# Altium PCB pcb.PcbDoc (part 1 of 2)
Units mm, origin at the board's own origin, x right, y up, seen from the top; angles counter-clockwise.
Board outline 152.4 x 101.6 mm, 4 copper layers (Top Layer, Internal Plane 1, Internal Plane 2, Bottom Layer); 121 components, 160 nets, 1544 pads, 60 vias.
Unrouted connection lines stored in the file: 211.
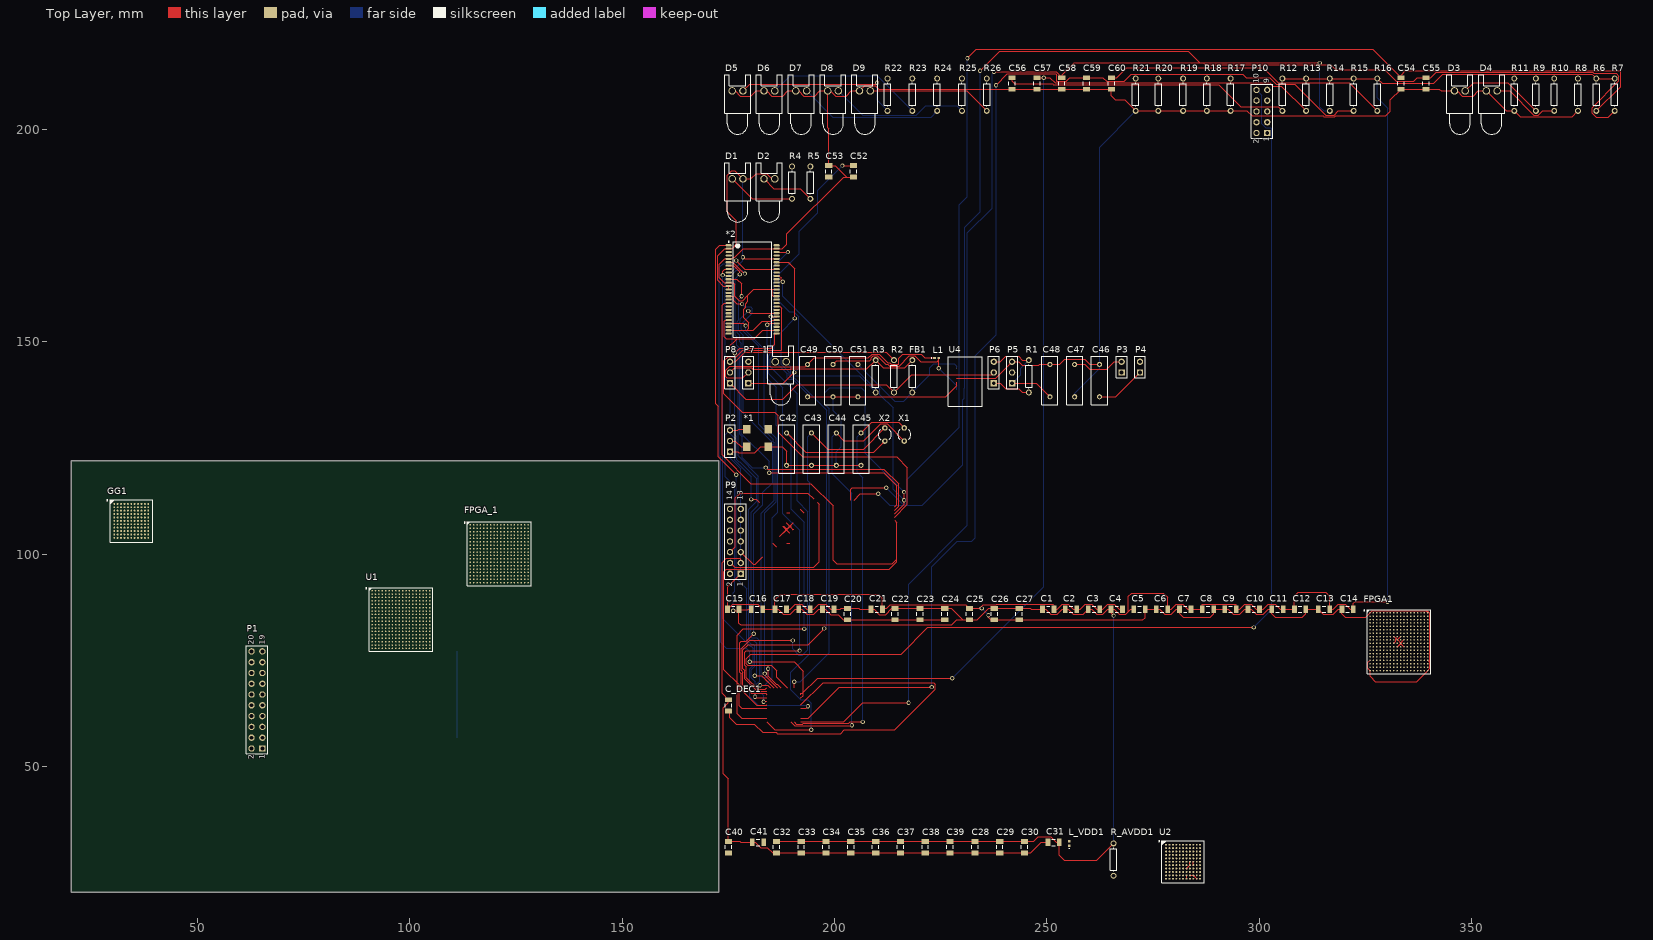
[diagram p0: Top Layer view]
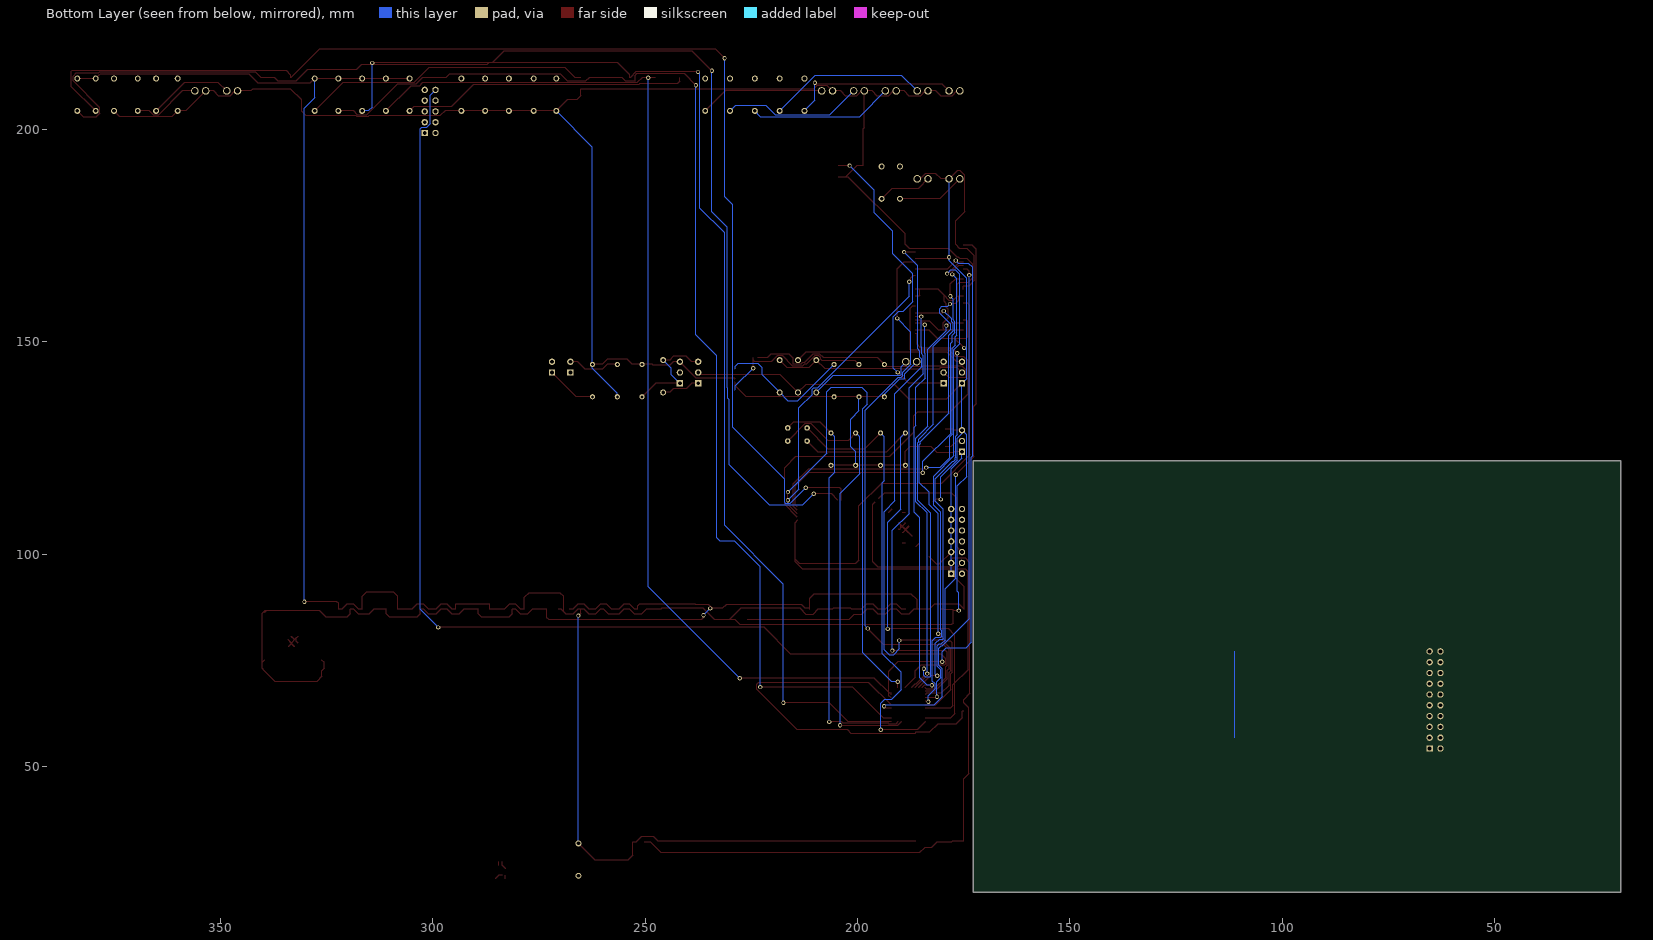
[diagram p1: Bottom Layer view, seen from below]
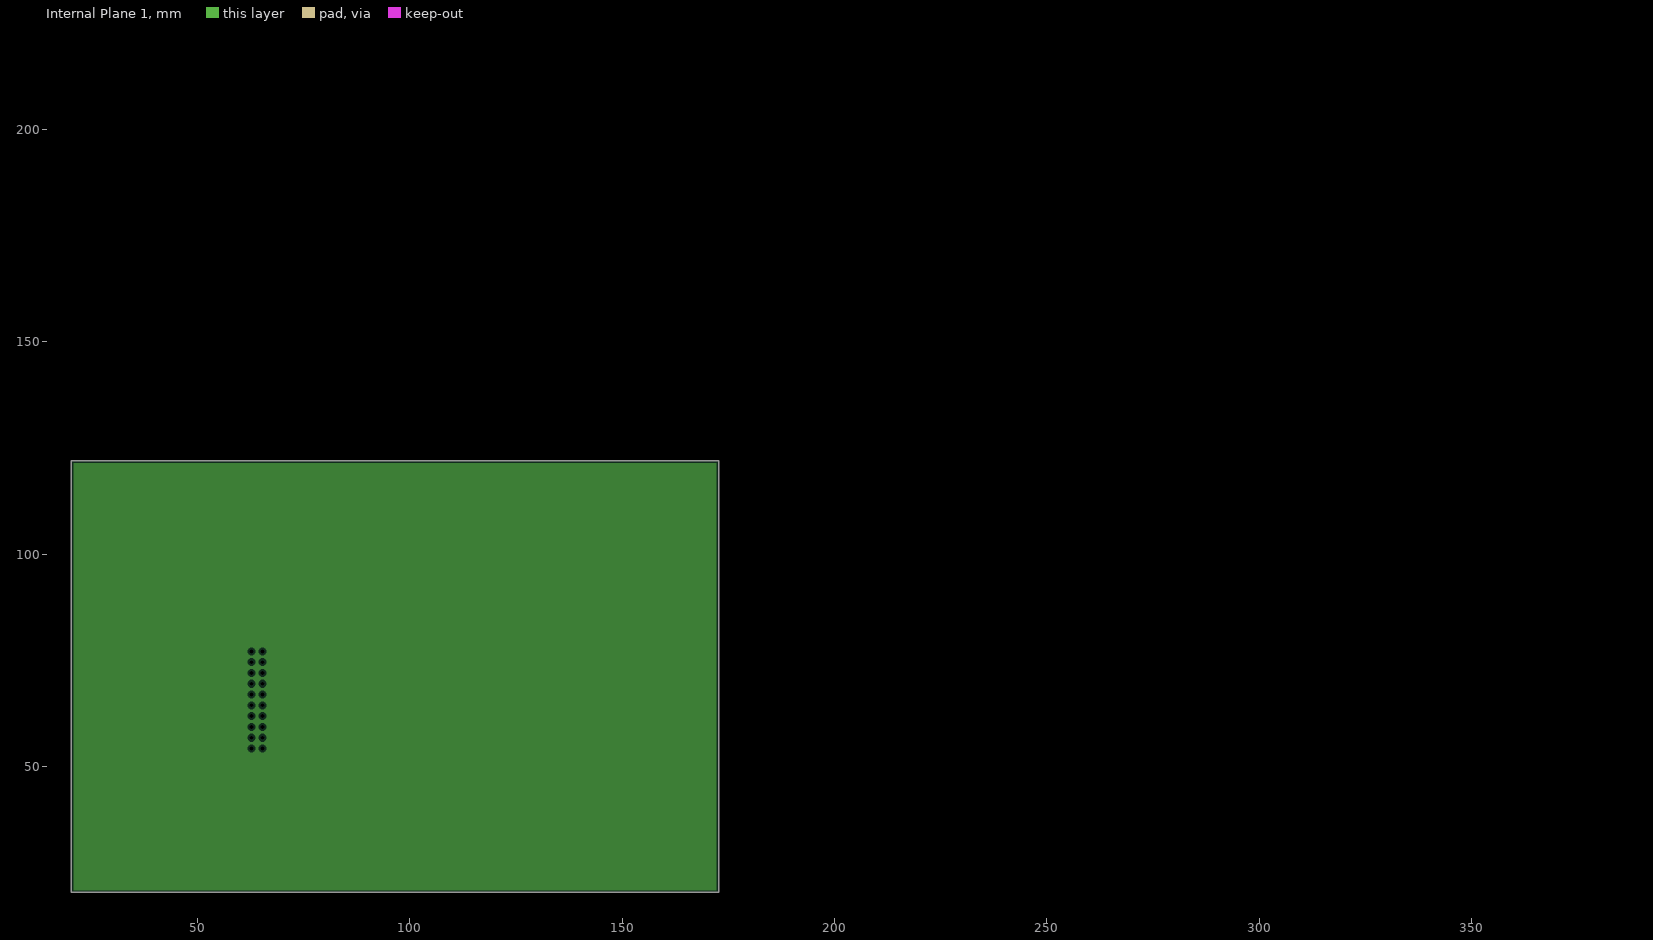
[diagram p2: Internal Plane 1, clearances drawn from the general rule]
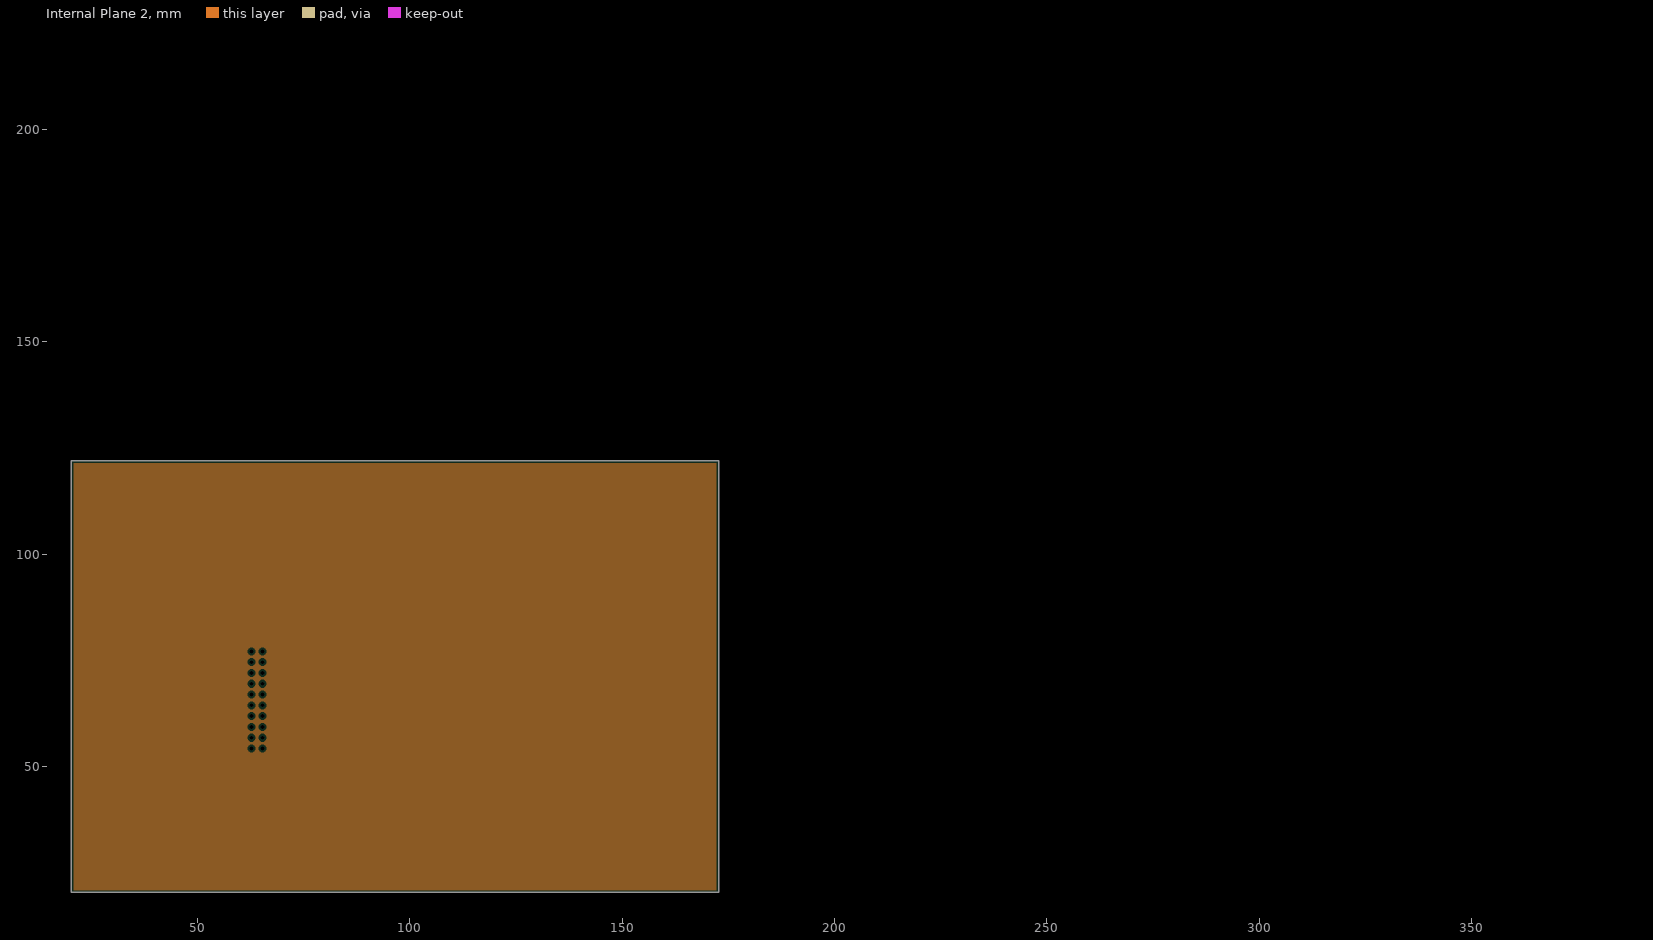
[diagram p3: Internal Plane 2, clearances drawn from the general rule]

## Layer stack, top to bottom
Top Layer: signal copper 0.0356
Dielectric: dielectric 0.32, FR-4, Dk 4.8
Internal Plane 1: plane copper 0.0356
Dielectric: dielectric 0.32, FR-4, Dk 4.8
Internal Plane 2: plane copper 0.0356
Dielectric: dielectric 0.32, FR-4, Dk 4.8
Bottom Layer: signal copper 0.0356

## Board outline
20.32,20.32 172.72,20.32 172.72,121.92 20.32,121.92

## Design rules (kind name [scope] priority, off if disabled: settings)
AssemblyTestPointUsage AssemblyTestPointUsage_1 [All] p2:
AssemblyTestpoint AssemblyTestpoint_1 [All] p2: testpointundercomponent=TRUE minsize=1.016 maxsize=2.54 preferedsize=1.524 minholesize=0 maxholesize=1.016 preferedholesize=0.813 testpointgrid=0.025 usegrid=TRUE gridtolerance=0 allowsidetop=TRUE allowsidebottom=TRUE
Clearance [All] p1: gap=0.2
ComponentClearance ComponentClearance_1 [All] p2: gap=0.254 collisioncheckmode=3 verticalgap=0.254 showdistances=FALSE
DiffPairsRouting DiffPairsRouting_1 [All] p2: maxlimit=0.254 minlimit=0.254 mostfreqgap=0.254 maxuncoupledlength=12.7
FabricationTestPointUsage TestPointUsage [All] p2: valid=0 allowmultiple=FALSE
FabricationTestpoint Testpoint [All] p2: side=3 testpointundercomponent=TRUE minsize=1.016 maxsize=2.54 preferedsize=1.524 minholesize=0 maxholesize=1.016 preferedholesize=0.813 testpointgrid=0.025 allowsidetop=TRUE allowsidebottom=TRUE usegrid=TRUE gridtolerance=0
FanoutControl Fanout_LCC [IsLCC] p1: bgadir=Out bgaviamode=Centered fanoutstyle=Auto fanoutdirection=Alternating viagrid=0.025 // Fanout_LCC (Default Rule)
FanoutControl Fanout_BGA [IsBGA] p2: bgadir=Out bgaviamode=Centered fanoutstyle=Auto fanoutdirection=Alternating viagrid=0.025 // Fanout_BGA (Default Rule)
FanoutControl Fanout_Small [(CompPinCount < 5)] p3: bgadir=Out bgaviamode=Centered fanoutstyle=Auto fanoutdirection=OutThenIn viagrid=0.025 // Fanout_Small (Default Rule)
FanoutControl Fanout_SOIC [IsSOIC] p4: bgadir=Out bgaviamode=Centered fanoutstyle=Auto fanoutdirection=Alternating viagrid=0.025 // Fanout_SOIC (Default Rule)
FanoutControl Fanout_BGA_1 [IsBGA] p6: bgadir=Out bgaviamode=Centered fanoutstyle=Auto fanoutdirection=Alternating viagrid=0.025 // Fanout_BGA (Default Rule)
FanoutControl Fanout_LCC_1 [IsLCC] p7: bgadir=Out bgaviamode=Centered fanoutstyle=Auto fanoutdirection=Alternating viagrid=0.025 // Fanout_LCC (Default Rule)
FanoutControl Fanout_SOIC_1 [IsSOIC] p8: bgadir=Out bgaviamode=Centered fanoutstyle=Auto fanoutdirection=Alternating viagrid=0.025 // Fanout_SOIC (Default Rule)
FanoutControl Fanout_Small_1 [(CompPinCount < 5)] p9: bgadir=Out bgaviamode=Centered fanoutstyle=Auto fanoutdirection=OutThenIn viagrid=0.025 // Fanout_Small (Default Rule)
FanoutControl Fanout_Default_1 [All] p10: bgadir=Out bgaviamode=Centered fanoutstyle=Auto fanoutdirection=Alternating viagrid=0.025 // Fanout_Default (Default Rule)
Height Height_1 [All] p2: minheight=0 maxheight=25.4 prefheight=12.7
HoleSize HoleSize_1 [All] p2: absolutevalues=TRUE maxlimit=2.54 minlimit=0.025 maxpercent=80.000 minpercent=20.000
HoleToHoleClearance HoleToHoleClearance_1 [All] p2: gap=0.254 allowstackedmicrovias=TRUE
LayerPairs LayerPairs_1 [All] p2: enforce=TRUE
MinimumSolderMaskSliver MinimumSolderMaskSliver_1 [All] p2: minsoldermaskwidth=0.254
NetAntennae NetAntennae_1 [All] p2: netantennaetolerance=0
PasteMaskExpansion PasteMaskExpansion_1 [All] p2: expansion=0
PlaneClearance [All] p1: clearance=0.508
PlaneClearance PlaneClearance_1 [All] p2: clearance=0.508
PlaneConnect [All] p1: planeconnectstyle=Relief reliefexpansion=0.508 reliefentries=4 reliefconductorwidth=0.254 reliefairgap=0.254
PolygonConnect [All] p1: connectstyle=Relief reliefconductorwidth=0.254 reliefentries=4 polygonreliefangle="90 Angle" airgapwidth=0.254
PolygonConnect PolygonConnect_1 [All] p2: connectstyle=Relief reliefconductorwidth=0.254 reliefentries=4 polygonreliefangle="90 Angle" airgapwidth=0.254
RoomDefinition U_user_interface [InComponentClass('U_user_interface')] p1: confinementstyle=ConfineIn formatcopy=TRUE lockcomponents=FALSE outline 173.863,196.215 385.953,196.215 385.953,215.646 173.863,215.646
RoomDefinition U_uart_usb_bridge [InComponentClass('U_uart_usb_bridge')] p2: confinementstyle=ConfineIn formatcopy=TRUE lockcomponents=FALSE outline 173.863,177.927 208.28,177.927 208.28,194.945 173.863,194.945
RoomDefinition U_sram [InComponentClass('U_sram')] p3: confinementstyle=ConfineIn formatcopy=TRUE lockcomponents=FALSE outline 173.863,150.495 187.579,150.495 187.579,176.657 173.863,176.657
RoomDefinition U_power_supply [InComponentClass('U_power_supply')] p4: confinementstyle=ConfineIn formatcopy=TRUE lockcomponents=FALSE outline 173.863,134.493 273.812,134.493 273.812,149.352 173.863,149.352
RoomDefinition U_oscillation [InComponentClass('U_oscillation')] p5: confinementstyle=ConfineIn formatcopy=TRUE lockcomponents=FALSE outline 173.863,118.745 218.186,118.745 218.186,133.223 173.863,133.223
RoomDefinition U_fpga_sheet [InComponentClass('U_fpga_sheet')] p6: confinementstyle=ConfineIn formatcopy=TRUE lockcomponents=FALSE outline 173.863,91.948 216.154,91.948 216.154,117.475 173.863,117.475
RoomDefinition U_fpga_power [InComponentClass('U_fpga_power')] p7: confinementstyle=ConfineIn formatcopy=TRUE lockcomponents=FALSE outline 173.863,70.612 341.63,70.612 341.63,90.678 173.863,90.678
RoomDefinition U_arm_sheet [InComponentClass('U_arm_sheet')] p8: confinementstyle=ConfineIn formatcopy=TRUE lockcomponents=FALSE outline 173.863,37.084 202.184,37.084 202.184,69.469 173.863,69.469
RoomDefinition U_arm_power [InComponentClass('U_arm_power')] p9: confinementstyle=ConfineIn formatcopy=TRUE lockcomponents=FALSE outline 173.863,21.844 287.782,21.844 287.782,35.814 173.863,35.814
RoutingPriority RoutingPriority_1 [All] p2: routingpriority=0
RoutingTopology RoutingTopology_1 [All] p2: topology=Shortest
RoutingVias [All] p1: holewidth=0.6 width=1 viastyle="Through Hole" minholewidth=0.711 minwidth=1.27 maxholewidth=0.711 maxwidth=1.27
ShortCircuit ShortCircuit_1 [All] p2: allowed=FALSE
SilkToSilkClearance SilkToSilkClearance_1 [All] p2: silktosilkclearance=0.254
SilkToSolderMaskClearance SilkscreenOverComponentPads [IsPad] p2: minsilkscreentomaskgap=0.254 clearancetoexposedcopper=TRUE
SolderMaskExpansion [All] p1: expansion=0.102
SolderMaskExpansion SolderMaskExpansion_1 [All] p2: expansion=0.102
UnRoutedNet UnRoutedNet_1 [All] p2:
Width [All] p1: maxlimit=0.2 minlimit=0.2 preferedwidth=0.2
22 further rules are at their usual default settings.

## Classes and differential pairs
net class GPIO_FPGA[15..0]: GPIO_FPGA0 GPIO_FPGA1 GPIO_FPGA2 GPIO_FPGA3 GPIO_FPGA4 GPIO_FPGA5 GPIO_FPGA6 GPIO_FPGA7 GPIO_FPGA8 GPIO_FPGA9 GPIO_FPGA10 GPIO_FPGA11 GPIO_FPGA12 GPIO_FPGA13 GPIO_FPGA14 GPIO_FPGA15
net class GPIO[21..0]: GPIO0 GPIO1 GPIO2 GPIO3 GPIO4 GPIO5 GPIO6 GPIO7 GPIO8 GPIO9 GPIO10 GPIO11 GPIO12 GPIO13 GPIO14 GPIO15 GPIO16 GPIO17 GPIO18 GPIO19 GPIO20 GPIO21
net class EBI_AD[15..0]: EBI_AD0 EBI_AD1 EBI_AD2 EBI_AD3 EBI_AD4 EBI_AD5 EBI_AD6 EBI_AD7 EBI_AD8 EBI_AD9 EBI_AD10 EBI_AD11 EBI_AD12 EBI_AD13 EBI_AD14 EBI_AD15
net class EBI_A[22..0]: EBI_A0 EBI_A1 EBI_A2 EBI_A3 EBI_A4 EBI_A5 EBI_A6 EBI_A7 EBI_A8 EBI_A9 EBI_A10 EBI_A11 EBI_A12 EBI_A13 EBI_A14 EBI_A15 EBI_A16 EBI_A17 EBI_A18 EBI_A19 EBI_A20 EBI_A21 EBI_A22
net class DAC0_OUT[1..0]: DAC0_OUT0 DAC0_OUT1
net class CTRL_BUS[24..0]: CTRL_BUS0 CTRL_BUS1 CTRL_BUS2
component class U_user_interface: C54 C55 C56 C57 C58 C59 C60 D3 D4 D5 D6 D7 D8 D9 P10 R6 R7 R8 R9 R10 R11 R12 R13 R14 R15 R16 R17 R18 R19 R20 R21 R22 R23 R24 R25 R26
component class U_uart_usb_bridge: C52 C53 D1 D2 R4 R5 U5
component class U_sram: *2
component class U_power_supply: 1 ACS1 ACS2 C46 C47 C48 C49 C50 C51 FB1 L1 P3 P4 P5 P6 P7 P8 R1 R2 R3 U3 U4
component class U_oscillation: *1 C42 C43 C44 C45 P2 X1 X2
component class U_fpga_sheet: FPGA_1 P9 U1
component class U_fpga_power: C1 C2 C3 C4 C5 C6 C7 C8 C9 C10 C11 C12 C13 C14 C15 C16 C17 C18 C19 C20 C21 C22 C23 C24 C25 C26 C27 FPGA1
component class U_arm_sheet: C_DEC1 GG1 P1
component class U_arm_power: C28 C29 C30 C31 C32 C33 C34 C35 C36 C37 C38 C39 C40 C41 L_VDD1 R_AVDD1 U2

## Components (designator, comment, footprint, x,y, rotation, side; value= is the part's Value field where it differs from the comment)
1 "LED0" LED-0 187.325,145.288 r0 top
*1 "TXC-7W" TXC-7W 179.324,125.222 r0 top
*2 "CY7C1061AV33" CY7C1061AV33 180.721,162.306 r0 top
C1 "Cap Semi" C1206 250.317,86.995 r0 top
C2 "Cap Semi" C1206 255.651,86.995 r0 top
C3 "Cap Semi" C1206 261.112,86.995 r0 top
C4 "Cap Semi" C1206 266.446,86.995 r0 top
C5 "Cap Semi" C1206 271.78,86.995 r0 top
C6 "Cap Semi" C1206 277.114,86.995 r0 top
C7 "Cap Semi" C1206 282.575,86.995 r0 top
C8 "Cap Semi" C1206 287.909,86.995 r0 top
C9 "Cap Semi" C1206 293.243,86.995 r0 top
C10 "Cap Semi" C1206 298.704,86.995 r0 top
C11 "Cap Semi" C1206 304.292,86.995 r0 top
C12 "Cap Semi" C1206 309.626,86.995 r0 top
C13 "Cap Semi" C1206 315.214,86.995 r0 top
C14 "Cap Semi" C1206 320.802,86.995 r0 top
C15 "Cap Semi" C1206 176.149,86.995 r0 top
C16 "Cap Semi" C1206 181.737,86.995 r0 top
C17 "Cap Semi" C1206 187.325,86.995 r0 top
C18 "Cap Semi" C1206 192.913,86.995 r0 top
C19 "Cap Semi" C1206 198.501,86.995 r0 top
C20 "Cap Semi" C1206 203.073,85.852 r90 top
C21 "Cap Semi" C1206 209.931,86.995 r0 top
C22 "Cap Semi" C1206 214.249,85.852 r90 top
C23 "Cap Semi" C1206 220.091,85.852 r90 top
C24 "Cap Semi" C1206 225.933,85.852 r90 top
C25 "Cap Semi" C1206 231.775,85.852 r90 top
C26 "Cap Semi" C1206 237.617,85.852 r90 top
C27 "Cap Semi" C1206 243.459,85.852 r90 top
C28 "Cap Semi" C1206 233.045,30.988 r90 top
C29 "Cap Semi" C1206 238.887,30.988 r90 top
C30 "Cap Semi" C1206 244.729,30.988 r90 top
C31 "Cap Semi" C1206 251.587,32.131 r0 top
C32 "Cap Semi" C1206 186.309,30.988 r90 top
C33 "Cap Semi" C1206 192.151,30.988 r90 top
C34 "Cap Semi" C1206 197.993,30.988 r90 top
C35 "Cap Semi" C1206 203.835,30.988 r90 top
C36 "Cap Semi" C1206 209.677,30.988 r90 top
C37 "Cap Semi" C1206 215.519,30.988 r90 top
C38 "Cap Semi" C1206 221.361,30.988 r90 top
C39 "Cap Semi" C1206 227.203,30.988 r90 top
C40 "Cap Semi" C1206 175.006,30.988 r90 top
C41 "Cap Semi" C1206 181.991,32.131 r0 top
C42 "Cap" RAD-0.3 188.722,124.714 r90 top
C43 "Cap" RAD-0.3 194.564,124.714 r90 top
C44 "Cap" RAD-0.3 200.406,124.714 r90 top
C45 "Cap" RAD-0.3 206.248,124.714 r90 top
C46 "Cap" RAD-0.3 262.382,140.843 r90 top
C47 "Cap" RAD-0.3 256.54,140.843 r90 top
C48 "Cap" RAD-0.3 250.698,140.843 r90 top
C49 "Cap" RAD-0.3 193.675,140.843 r90 top
C50 "Cap" RAD-0.3 199.644,140.843 r90 top
C51 "Cap" RAD-0.3 205.486,140.843 r90 top
C52 "Cap Semi" C1206 204.47,190.119 r90 top
C53 "Cap Semi" C1206 198.628,190.119 r90 top
C54 "Cap Semi" C1206 333.375,210.82 r90 top
C55 "Cap Semi" C1206 339.217,210.82 r90 top
C56 "Cap Semi" C1206 241.808,210.82 r90 top
C57 "Cap Semi" C1206 247.65,210.82 r90 top
C58 "Cap Semi" C1206 253.492,210.82 r90 top
C59 "Cap Semi" C1206 259.334,210.82 r90 top
C60 "Cap Semi" C1206 265.176,210.82 r90 top
C_DEC1 "Cap Semi" C1206 175.006,64.389 r90 top
D1 "LED0" LED-0 177.165,188.341 r0 top
D2 "LED0" LED-0 184.658,188.341 r0 top
D3 "LED0" LED-0 347.218,209.042 r0 top
D4 "LED0" LED-0 354.711,209.042 r0 top
D5 "LED0" LED-0 177.165,209.042 r0 top
D6 "LED0" LED-0 184.658,209.042 r0 top
D7 "LED0" LED-0 192.151,209.042 r0 top
D8 "LED0" LED-0 199.644,209.042 r0 top
D9 "LED0" LED-0 207.137,209.042 r0 top
FB1 "Res1" AXIAL-0.3 218.313,141.859 r90 top
FPGA1 "XC6SLX16-2CSG324C" CSG324 332.867,79.375 r0 top
FPGA_1 "XC6SLX16-2CSG324C" CSG324 121.031,100.076 r0 top
GG1 "EFM32GG990F1024-BGA112" ENMR-BGA112 34.417,107.823 r0 top
L1 "Inductor" 0402-A 224.028,146.177 r0 top
L_VDD1 "BLM21B102S or similar" 0402-A 255.27,31.877 r90 top
P1 "Header 10X2" HDR2X10 65.278,54.229 r90 top
P2 "Header 3" HDR1X3 175.387,124.079 r90 top
P3 "Header 2" HDR1X2 267.589,142.748 r90 top
P4 "Header 2" HDR1X2 271.907,142.748 r90 top
P5 "Header 3" HDR1X3 241.808,140.208 r90 top
P6 "Header 3" HDR1X3 237.49,140.208 r90 top
P7 "Header 3" HDR1X3 179.705,140.208 r90 top
P8 "Header 3" HDR1X3 175.387,140.208 r90 top
P9 "Header 7X2" HDR2X7 177.927,95.377 r90 top
P10 "Header 5X2" HDR2X5 301.879,199.136 r90 top
R1 "Rsense" AXIAL-0.3 245.745,141.859 r90 top
R2 "Rsense" AXIAL-0.3 213.995,141.859 r90 top
R3 "Res1" AXIAL-0.3 209.677,141.859 r90 top
R4 "Res1" AXIAL-0.3 189.992,187.452 r90 top
R5 "Res1" AXIAL-0.3 194.31,187.452 r90 top
R6 "Res1" AXIAL-0.3 379.349,208.153 r90 top
R7 "Res1" AXIAL-0.3 383.667,208.153 r90 top
R8 "Res1" AXIAL-0.3 375.031,208.153 r90 top
R9 "Res1" AXIAL-0.3 365.125,208.153 r90 top
R10 "Res1" AXIAL-0.3 369.443,208.153 r90 top
R11 "Res1" AXIAL-0.3 360.045,208.153 r90 top
R12 "Res1" AXIAL-0.3 305.435,208.153 r90 top
R13 "Res1" AXIAL-0.3 311.023,208.153 r90 top
R14 "Res1" AXIAL-0.3 316.611,208.153 r90 top
R15 "Res1" AXIAL-0.3 322.199,208.153 r90 top
R16 "Res1" AXIAL-0.3 327.787,208.153 r90 top
R17 "Res1" AXIAL-0.3 293.243,208.153 r90 top
R18 "Res1" AXIAL-0.3 287.655,208.153 r90 top
R19 "Res1" AXIAL-0.3 282.067,208.153 r90 top
R20 "Res1" AXIAL-0.3 276.225,208.153 r90 top
R21 "Res1" AXIAL-0.3 270.891,208.153 r90 top
R22 "Res1" AXIAL-0.3 212.471,208.153 r90 top
R23 "Res1" AXIAL-0.3 218.313,208.153 r90 top
R24 "Res1" AXIAL-0.3 224.155,208.153 r90 top
R25 "Res1" AXIAL-0.3 229.997,208.153 r90 top
R26 "Res1" AXIAL-0.3 235.839,208.153 r90 top
R_AVDD1 "Res1" AXIAL-0.3 265.684,28.067 r90 top
U1 "XC6SLX16-2CSG324C" CSG324 97.917,84.582 r0 top
U2 "EFM32GG990F1024-BGA112" ENMR-BGA112 282.067,27.559 r0 top
U4 "SR10S3V3" SR10S3V3_Footprint 228.727,138.303 r90 top
X1 "32MHz" R38 216.408,128.143 r0 top
X2 "32.768kHz" R38 211.836,128.143 r0 top

## Footprints (in the part's own frame and the unit in brackets; to place one, negate y for a bottom-side part, rotate by r counter-clockwise, add the part's x,y. Pads: shape width x height; smd on the part's side, far side on the other; paste and mask are expansions set on the pad)
0402-A [mm] "Chip Inductor, Body 1.0x0.5mm, IPC High Density"
  rect 0.6x0.5 smd: 1(-0.5,0) 2(0.5,0)
  silkscreen extent -1.1,-0.15 -1.1,0.15, body extent -0.55,-0.3 0.55,0.3, height 0.55
AXIAL-0.3 [mm] "Axial Device, Thru-Hole; 2 Leads; 0.3 in Pin Spacing"
  round 1.4 hole 0.85: 1(-3.81,0) 2(3.81,0)
  silkscreen extent -2.77,-0.76 2.77,0.76
C1206 [mm] "Chip Capacitor, Body 3.2x1.6mm, IPC High Density"
  rect 1.1x1.7 smd: 1(-1.35,0) 2(1.35,0)
  silkscreen extent -0.4,-0.75 0.4,0.75, body extent -1.7,-0.9 1.7,0.9, height 1.3
CSG324 [mm] "BGA, 324-Leads, Body 15x15mm, Pitch 0.8mm"
  round 0.36 smd: A1(-6.8,6.8) A2(-6,6.8) A3(-5.2,6.8) A4(-4.4,6.8) A5(-3.6,6.8) A6(-2.8,6.8) A7(-2,6.8) A8(-1.2,6.8) A9(-0.4,6.8) A10(0.4,6.8) A11(1.2,6.8) A12(2,6.8) A13(2.8,6.8) A14(3.6,6.8) A15(4.4,6.8) A16(5.2,6.8) A17(6,6.8) A18(6.8,6.8) B1(-6.8,6) B2(-6,6) B3(-5.2,6) B4(-4.4,6) B5(-3.6,6) B6(-2.8,6) B7(-2,6) B8(-1.2,6) B9(-0.4,6) B10(0.4,6) B11(1.2,6) B12(2,6) B13(2.8,6) B14(3.6,6) B15(4.4,6) B16(5.2,6) B17(6,6) B18(6.8,6) C1(-6.8,5.2) C2(-6,5.2) C3(-5.2,5.2) C4(-4.4,5.2) C5(-3.6,5.2) C6(-2.8,5.2) C7(-2,5.2) C8(-1.2,5.2) C9(-0.4,5.2) C10(0.4,5.2) C11(1.2,5.2) C12(2,5.2) C13(2.8,5.2) C14(3.6,5.2) C15(4.4,5.2) C16(5.2,5.2) C17(6,5.2) C18(6.8,5.2) D1(-6.8,4.4) D2(-6,4.4) D3(-5.2,4.4) D4(-4.4,4.4) D5(-3.6,4.4) D6(-2.8,4.4) D7(-2,4.4) D8(-1.2,4.4) D9(-0.4,4.4) D10(0.4,4.4) D11(1.2,4.4) D12(2,4.4) D13(2.8,4.4) D14(3.6,4.4) D15(4.4,4.4) D16(5.2,4.4) D17(6,4.4) D18(6.8,4.4) E1(-6.8,3.6) E2(-6,3.6) E3(-5.2,3.6) E4(-4.4,3.6) E5(-3.6,3.6) E6(-2.8,3.6) E7(-2,3.6) E8(-1.2,3.6) E9(-0.4,3.6) E10(0.4,3.6) E11(1.2,3.6) E12(2,3.6) E13(2.8,3.6) E14(3.6,3.6) E15(4.4,3.6) E16(5.2,3.6) E17(6,3.6) E18(6.8,3.6) F1(-6.8,2.8) F2(-6,2.8) F3(-5.2,2.8) F4(-4.4,2.8) F5(-3.6,2.8) F6(-2.8,2.8) F7(-2,2.8) F8(-1.2,2.8) F9(-0.4,2.8) F10(0.4,2.8) F11(1.2,2.8) F12(2,2.8) F13(2.8,2.8) F14(3.6,2.8) F15(4.4,2.8) F16(5.2,2.8) F17(6,2.8) F18(6.8,2.8) G1(-6.8,2) G2(-6,2) G3(-5.2,2) G4(-4.4,2) G5(-3.6,2) G6(-2.8,2) G7(-2,2) G8(-1.2,2) G9(-0.4,2) G10(0.4,2) G11(1.2,2) G12(2,2) G13(2.8,2) G14(3.6,2) G15(4.4,2) G16(5.2,2) G17(6,2) G18(6.8,2) H1(-6.8,1.2) H2(-6,1.2) H3(-5.2,1.2) H4(-4.4,1.2) H5(-3.6,1.2) H6(-2.8,1.2) H7(-2,1.2) H8(-1.2,1.2) H9(-0.4,1.2) H10(0.4,1.2) H11(1.2,1.2) H12(2,1.2) H13(2.8,1.2) H14(3.6,1.2) H15(4.4,1.2) H16(5.2,1.2) H17(6,1.2) H18(6.8,1.2) J1(-6.8,0.4) J2(-6,0.4) J3(-5.2,0.4) J4(-4.4,0.4) J5(-3.6,0.4) J6(-2.8,0.4) J7(-2,0.4) J8(-1.2,0.4) J9(-0.4,0.4) J10(0.4,0.4) J11(1.2,0.4) J12(2,0.4) J13(2.8,0.4) J14(3.6,0.4) J15(4.4,0.4) J16(5.2,0.4) J17(6,0.4) J18(6.8,0.4) K1(-6.8,-0.4) K2(-6,-0.4) K3(-5.2,-0.4) K4(-4.4,-0.4) K5(-3.6,-0.4) K6(-2.8,-0.4) K7(-2,-0.4) K8(-1.2,-0.4) K9(-0.4,-0.4) K10(0.4,-0.4) K11(1.2,-0.4) K12(2,-0.4) K13(2.8,-0.4) K14(3.6,-0.4) K15(4.4,-0.4) K16(5.2,-0.4) K17(6,-0.4) K18(6.8,-0.4) L1(-6.8,-1.2) L2(-6,-1.2) L3(-5.2,-1.2) L4(-4.4,-1.2) L5(-3.6,-1.2) L6(-2.8,-1.2) L7(-2,-1.2) L8(-1.2,-1.2) L9(-0.4,-1.2) L10(0.4,-1.2) L11(1.2,-1.2) L12(2,-1.2) L13(2.8,-1.2) L14(3.6,-1.2) L15(4.4,-1.2) L16(5.2,-1.2) L17(6,-1.2) L18(6.8,-1.2) M1(-6.8,-2) M2(-6,-2) M3(-5.2,-2) M4(-4.4,-2) M5(-3.6,-2) M6(-2.8,-2) M7(-2,-2) M8(-1.2,-2) M9(-0.4,-2) M10(0.4,-2) M11(1.2,-2) M12(2,-2) M13(2.8,-2) M14(3.6,-2) M15(4.4,-2) M16(5.2,-2) M17(6,-2) M18(6.8,-2) N1(-6.8,-2.8) N2(-6,-2.8) N3(-5.2,-2.8) N4(-4.4,-2.8) N5(-3.6,-2.8) N6(-2.8,-2.8) N7(-2,-2.8) N8(-1.2,-2.8) N9(-0.4,-2.8) N10(0.4,-2.8) N11(1.2,-2.8) N12(2,-2.8) N13(2.8,-2.8) N14(3.6,-2.8) N15(4.4,-2.8) N16(5.2,-2.8) N17(6,-2.8) N18(6.8,-2.8) P1(-6.8,-3.6) P2(-6,-3.6) P3(-5.2,-3.6) P4(-4.4,-3.6) P5(-3.6,-3.6) P6(-2.8,-3.6) P7(-2,-3.6) P8(-1.2,-3.6) P9(-0.4,-3.6) P10(0.4,-3.6) P11(1.2,-3.6) P12(2,-3.6) P13(2.8,-3.6) P14(3.6,-3.6) P15(4.4,-3.6) P16(5.2,-3.6) P17(6,-3.6) P18(6.8,-3.6) R1(-6.8,-4.4) R2(-6,-4.4) R3(-5.2,-4.4) R4(-4.4,-4.4) R5(-3.6,-4.4) R6(-2.8,-4.4) R7(-2,-4.4) R8(-1.2,-4.4) R9(-0.4,-4.4) R10(0.4,-4.4) R11(1.2,-4.4) R12(2,-4.4) R13(2.8,-4.4) R14(3.6,-4.4) R15(4.4,-4.4) R16(5.2,-4.4) R17(6,-4.4) R18(6.8,-4.4) T1(-6.8,-5.2) T2(-6,-5.2) T3(-5.2,-5.2) T4(-4.4,-5.2) T5(-3.6,-5.2) T6(-2.8,-5.2) T7(-2,-5.2) T8(-1.2,-5.2) T9(-0.4,-5.2) T10(0.4,-5.2) T11(1.2,-5.2) T12(2,-5.2) T13(2.8,-5.2) T14(3.6,-5.2) T15(4.4,-5.2) T16(5.2,-5.2) T17(6,-5.2) T18(6.8,-5.2) U1(-6.8,-6) U2(-6,-6) U3(-5.2,-6) U4(-4.4,-6) U5(-3.6,-6) U6(-2.8,-6) U7(-2,-6) U8(-1.2,-6) U9(-0.4,-6) U10(0.4,-6) U11(1.2,-6) U12(2,-6) U13(2.8,-6) U14(3.6,-6) U15(4.4,-6) U16(5.2,-6) U17(6,-6) U18(6.8,-6) V1(-6.8,-6.8) V2(-6,-6.8) V3(-5.2,-6.8) V4(-4.4,-6.8) V5(-3.6,-6.8) V6(-2.8,-6.8) V7(-2,-6.8) V8(-1.2,-6.8) V9(-0.4,-6.8) V10(0.4,-6.8) V11(1.2,-6.8) V12(2,-6.8) V13(2.8,-6.8) V14(3.6,-6.8) V15(4.4,-6.8) V16(5.2,-6.8) V17(6,-6.8) V18(6.8,-6.8)
  silkscreen extent -8.27,-7.5 7.5,7.5, body extent -7.5,-7.5 7.5,7.5, height 1.5
CY7C1061AV33 [mm] "TSOP, 54-Leads, Body 22,41x10,16mm, Pitch 0,80mm, IPC Medium Density"
  oval 1.45x0.5 smd: 1(-5.65,10.4) 2(-5.65,9.6) 3(-5.65,8.8) 4(-5.65,8) 5(-5.65,7.2) 6(-5.65,6.4) 7(-5.65,5.6) 8(-5.65,4.8) 9(-5.65,4) 10(-5.65,3.2) 11(-5.65,2.4) 12(-5.65,1.6) 13(-5.65,0.8) 14(-5.65,0) 15(-5.65,-0.8) 16(-5.65,-1.6) 17(-5.65,-2.4) 18(-5.65,-3.2) 19(-5.65,-4) 20(-5.65,-4.8) 21(-5.65,-5.6) 22(-5.65,-6.4) 23(-5.65,-7.2) 24(-5.65,-8) 25(-5.65,-8.8) 26(-5.65,-9.6) 27(-5.65,-10.4) 28(5.65,-10.4) 29(5.65,-9.6) 30(5.65,-8.8) 31(5.65,-8) 32(5.65,-7.2) 33(5.65,-6.4) 34(5.65,-5.6) 35(5.65,-4.8) 36(5.65,-4) 37(5.65,-3.2) 38(5.65,-2.4) 39(5.65,-1.6) 40(5.65,-0.8) 41(5.65,0) 42(5.65,0.8) 43(5.65,1.6) 44(5.65,2.4) 45(5.65,3.2) 46(5.65,4) 47(5.65,4.8) 48(5.65,5.6) 49(5.65,6.4) 50(5.65,7.2) 51(5.65,8) 52(5.65,8.8) 53(5.65,9.6) 54(5.65,10.4)
  silkscreen extent -5.77,-11.25 4.53,11.32, body extent -5.15,-11.25 5.15,11.25, height 1.2
ENMR-BGA112 [mm] "BGA, 112-Balls, Body 10x10mm, Pitch 0.8mm"
  round 0.45 smd: A1(-4,4) A2(-3.2,4) A3(-2.4,4) A4(-1.6,4) A5(-0.8,4) A6(0,4) A7(0.8,4) A8(1.6,4) A9(2.4,4) A10(3.2,4) A11(4,4) B1(-4,3.2) B2(-3.2,3.2) B3(-2.4,3.2) B4(-1.6,3.2) B5(-0.8,3.2) B6(0,3.2) B7(0.8,3.2) B8(1.6,3.2) B9(2.4,3.2) B10(3.2,3.2) B11(4,3.2) C1(-4,2.4) C2(-3.2,2.4) C3(-2.4,2.4) C4(-1.6,2.4) C5(-0.8,2.4) C6(0,2.4) C7(0.8,2.4) C8(1.6,2.4) C9(2.4,2.4) C10(3.2,2.4) C11(4,2.4) D1(-4,1.6) D2(-3.2,1.6) D3(-2.4,1.6) D4(-1.6,1.6) D5(-0.8,1.6) D6(0,1.6) D7(0.8,1.6) D8(1.6,1.6) D9(2.4,1.6) D10(3.2,1.6) D11(4,1.6) E1(-4,0.8) E2(-3.2,0.8) E3(-2.4,0.8) E4(-1.6,0.8) E5(-0.8,0.8) E6(0,0.8) E7(0.8,0.8) E8(1.6,0.8) E9(2.4,0.8) E10(3.2,0.8) E11(4,0.8) F1(-4,0) F2(-3.2,0) F3(-2.4,0) F4(-1.6,0) F5(-0.8,0) F6(0,0) F7(0.8,0) F8(1.6,0) F9(2.4,0) F10(3.2,0) F11(4,0) G1(-4,-0.8) G2(-3.2,-0.8) G3(-2.4,-0.8) G4(-1.6,-0.8) G5(-0.8,-0.8) G6(0,-0.8) G7(0.8,-0.8) G8(1.6,-0.8) G9(2.4,-0.8) G10(3.2,-0.8) G11(4,-0.8) H1(-4,-1.6) H2(-3.2,-1.6) H3(-2.4,-1.6) H4(-1.6,-1.6) H5(-0.8,-1.6) H6(0,-1.6) H7(0.8,-1.6) H8(1.6,-1.6) H9(2.4,-1.6) H10(3.2,-1.6) H11(4,-1.6) J1(-4,-2.4) J2(-3.2,-2.4) J3(-2.4,-2.4) J4(-1.6,-2.4) J5(-0.8,-2.4) J6(0,-2.4) J7(0.8,-2.4) J8(1.6,-2.4) J9(2.4,-2.4) J10(3.2,-2.4) J11(4,-2.4) K1(-4,-3.2) K2(-3.2,-3.2) K3(-2.4,-3.2) K4(-1.6,-3.2) K5(-0.8,-3.2) K6(0,-3.2) K7(0.8,-3.2) K8(1.6,-3.2) K9(2.4,-3.2) K10(3.2,-3.2) K11(4,-3.2) L1(-4,-4) L2(-3.2,-4) L3(-2.4,-4) L4(-1.6,-4) L5(-0.8,-4) L6(0,-4) L7(0.8,-4) L8(1.6,-4) L9(2.4,-4) L10(3.2,-4) L11(4,-4)
  silkscreen extent -5.77,-5 5,5, body extent -5,-5 5,5, height 1.3
HDR1X2 [mm] "Connector; Header; 2 Position"
  rect 1.5x1.5 hole 0.9: 1(0,0)
  round 1.5 hole 0.9: 2(2.54,0)
  silkscreen extent -1.27,-1.27 3.81,1.27
HDR1X3 [mm] "Connector; Header; 3 Position"
  rect 1.5x1.5 hole 0.9: 1(0,0)
  round 1.5 hole 0.9: 2(2.54,0) 3(5.08,0)
  silkscreen extent -1.27,-1.27 6.35,1.27
HDR2X5 [mm] "Connector; Header; 5x2 Position"
  rect 1.5x1.5 hole 0.9: 1(0,0)
  round 1.5 hole 0.9: 2(0,2.54) 3(2.54,0) 4(2.54,2.54) 5(5.08,0) 6(5.08,2.54) 7(7.62,0) 8(7.62,2.54) 9(10.16,0) 10(10.16,2.54)
  silkscreen extent -1.27,-1.27 11.43,3.81
HDR2X7 [mm] "Connector; Header; 7x2 Position"
  rect 1.5x1.5 hole 0.9: 1(0,0)
  round 1.5 hole 0.9: 2(0,2.54) 3(2.54,0) 4(2.54,2.54) 5(5.08,0) 6(5.08,2.54) 7(7.62,0) 8(7.62,2.54) 9(10.16,0) 10(10.16,2.54) 11(12.7,0) 12(12.7,2.54) 13(15.24,0) 14(15.24,2.54)
  silkscreen extent -1.27,-1.27 16.51,3.81
HDR2X10 [mm] "Connector; Header; 10x2 Position"
  rect 1.5x1.5 hole 0.9: 1(0,0)
  round 1.5 hole 0.9: 2(0,2.54) 3(2.54,0) 4(2.54,2.54) 5(5.08,0) 6(5.08,2.54) 7(7.62,0) 8(7.62,2.54) 9(10.16,0) 10(10.16,2.54) 11(12.7,0) 12(12.7,2.54) 13(15.24,0) 14(15.24,2.54) 15(17.78,0) 16(17.78,2.54) 17(20.32,0) 18(20.32,2.54) 19(22.86,0) 20(22.86,2.54)
  silkscreen extent -1.27,-1.27 24.13,3.81
LED-0 [mil] "LED; 2 Leads"
  round 70 hole 50: 1(50,0) 2(-50,0)
  silkscreen extent -120,-400 120,150
R38 [mm] "Crystal, Thru-Hole; 2 Leads; Body 3.1 x 8.2 mm (Dia.xH)"
  round 1.3 hole 0.7: 1(0,1.55) 2(0,-1.55)
  silkscreen extent -1.55,-1.19 1.55,1.17
RAD-0.3 [mm] "Radial Cap, Thru-Hole; 2 Leads; 0.3 in Pin Spacing"
  round 1.2 hole 0.7: 1(-3.81,0) 2(3.81,0)
  silkscreen extent -5.71,-1.91 5.71,1.91
SR10S3V3_Footprint [mm]
  rect 0.5x0.25 hole 0.7: 1(0,0) 2(2.54,0) 3(5.08,0)
  silkscreen extent -3.5,-6.06 8.21,2.01
TXC-7W [mm]
  rect 1.8x2 smd: 1(0,0) 2(5.08,0) 3(5.08,4.2) 4(0,4.2)

## Part data
1 D1 D2 D3 D4 D5 D6 D7 D8 D9: "Typical INFRARED GaAs LED"
C1 C2 C3 C4 C5 C6 C7 C8 C9 C10 C11 C12 C13 C14 C15 C16 C17 C18 C19 C20 C21 C22 C23 C24 C25 C26 C27 C28 C29 C30 C31 C32 C33 C34 C35 C36 C37 C38 C39 C40 C41 C52 C53 C54 C55 C56 C57 C58 C59 C60 C_DEC1: "Capacitor (Semiconductor SIM Model)"
C42 C43 C44 C45 C46 C47 C48 C49 C50 C51: "Capacitor"
FB1 R3 R4 R5 R6 R7 R8 R9 R10 R11 R12 R13 R14 R15 R16 R17 R18 R19 R20 R21 R22 R23 R24 R25 R26 R_AVDD1: "Resistor"
FPGA1 FPGA_1 U1: "Spartan-6 LX 1.2V FPGA, 232 User I/Os, 324-Ball Chip-Scale BGA (0.8mm Pitch), Speed Grade 2, Commercial Grade, Pb-Free"
GG1 U2: "EFM32 Giant Gecko, M3 ARM Cortex CPU, 1024 KB Flash, 128 KB RAM, 1.85 - 3.8 V Supply, 48 MHz Max Speed, -40 to 85 degC, 112-Pin BGA, RoHS Compliant"
L_VDD1: library part Inductor, "Inductor"
P1: "Header, 10-Pin, Dual row"
P2 P5 P6 P7 P8: "Header, 3-Pin"
P3 P4: "Header, 2-Pin"
P9: "Header, 7-Pin, Dual row"
P10: "Header, 5-Pin, Dual row"
R1 R2: library part Res1, "Resistor"
X1 X2: library part XTAL, "Crystal Oscillator"

## Via types
v1: diameter 1, hole 0.6, Top Layer to Bottom Layer, 60 vias

## Nets (pads, with @x,y where several pads share a name; then routed paths per layer and width w, separated by ;. In a path a pad name is that pad's centre, name@x,y a point inside that pad or via, vN(x,y) a via of type N, cw(c..) or ccw(c..) an arc to the next point about the centre after c; other vN are vias at no path point)
CTRL_BUS0: FPGA_1.C7 GG1.A8
CTRL_BUS1: FPGA_1.B8 GG1.H1
CTRL_BUS2: FPGA_1.B9 GG1.J1
DAC0_OUT0: GG1.L5
DAC0_OUT1: GG1.L6
EBI_A0: FPGA_1.F15 GG1.J4
EBI_A1: FPGA_1.F16 GG1.K3
EBI_A2: FPGA_1.C17 GG1.L3
EBI_A3: *2.11 FPGA_1.C18 GG1.J7 | length 88
  Top Layer w0.2: *2.11@175.071,164.706 176.987,164.706 178.105,163.588 v1(178.105,160.706) ; v1(184.607,119.151) 211.582,119.151 214.681,116.053 214.681,111.608 214.191,111.118
  Bottom Layer w0.2: v1(178.105,160.706) 177.425,160.026 177.425,155.135 177.038,154.748 177.038,152.157 177.733,151.462 177.733,149.977 178.079,149.63 178.079,128.372 184.607,121.844 v1(184.607,119.151)
EBI_A4: *2.10 FPGA_1.F14 GG1.J8
EBI_A5: *2.9 FPGA_1.G14 GG1.G10
EBI_A6: *2.8 FPGA_1.D17 GG1.G11 | length 121.7
  Top Layer w0.2: v1(173.66,165.684) 173.66,166.623 174.142,167.106 *2.8@175.071,167.106 ; 192.087,63.716 193.281,63.716 v1(193.726,64.16)
  Bottom Layer w0.2: v1(173.66,165.684) 173.66,84.811 180.194,78.276 180.377,78.276 180.835,77.818 180.835,73.825 180.029,73.019 180.029,66.402 182.04,64.391 193.495,64.391 v1(193.726,64.16)
EBI_A7: *2.7 FPGA_1.D18 GG1.E9 | length 94
  Top Layer w0.2: *2.7@175.071,167.906 176.213,167.906 177.698,166.421 v1(177.698,165.846) ; v1(183.807,120.376) 184.219,119.964 211.633,119.964 215.087,116.51 215.087,111.214 214.191,110.318
  Bottom Layer w0.2: v1(177.698,165.846) 176.638,164.786 176.638,151.496 177.025,151.108 177.025,149.148 177.679,148.495 177.679,128.184 178.243,127.62 178.243,122.721 180.589,120.376 v1(183.807,120.376)
EBI_A8: *2.48 FPGA_1.H12 GG1.E10
EBI_A9: *2.47 FPGA_1.G13 GG1.D11 | length 133.7
  Top Layer w0.2: v1(176.834,169.113) 178.841,167.106 *2.47@186.371,167.106 ; v1(180.035,74.625) 190.475,74.625 192.634,72.466 192.634,66.663 192.087,66.116
  Bottom Layer w0.2: v1(176.834,169.113) 176.123,168.402 173.736,168.402 172.847,167.513 172.847,123.139 173.203,122.784 173.203,79.223 174.549,77.876 179.172,77.876 180.035,77.013 v1(180.035,74.625)
EBI_A10: *2.46 FPGA_1.E16 GG1.C10
EBI_A11: *2.45 FPGA_1.E18 GG1.A9 | length 184.2
  Top Layer w0.2: *2.45@186.371,165.506 186.897,165.506 187.396,165.007 187.396,164.496 v1(187.782,164.109) ; 190.487,68.516 v1(190.487,69.952) ; 214.191,109.518 216.357,111.684 v1(216.357,112.649) v1(216.357,114.605)
  Bottom Layer w0.2: v1(187.782,164.109) 187.782,160.731 209.448,139.065 210.414,139.065 210.693,138.786 210.693,137.49 213.792,134.391 213.792,117.17 ; v1(190.487,69.952) 191.973,69.952 198.78,76.759 198.78,134.163 197.688,135.255 197.688,137.973 198.882,139.167 206.248,139.167 207.239,138.176 207.239,123.723 213.792,117.17 ; v1(216.357,112.649) 213.792,115.214 213.792,117.17 ; v1(216.357,114.605) 213.792,117.17
EBI_A12: *2.44 FPGA_1.K12 GG1.B9
EBI_A13: *2.38 FPGA_1.K13 GG1.C9
EBI_A14: *2.37 FPGA_1.F17 GG1.D9
EBI_A15: *2.36 FPGA_1.F18 GG1.D10 | length 99.2
  Top Layer w0.2: *2.36@186.371,158.306 187.147,158.306 187.554,157.9 187.554,148.057 187.477,147.98 178.333,147.98 176.835,146.482 174.955,146.482 173.937,145.464 173.937,137.746 178.308,133.375 185.928,133.375 186.741,132.563 186.741,128.727 192.557,122.911 214.63,122.911 217.17,120.371 217.17,111.697 214.191,108.718
EBI_A16: *2.35 FPGA_1.H13 GG1.E4
EBI_A17: *2.34 FPGA_1.H14 GG1.F1 | length 112.1
  Top Layer w0.2: v1(179.654,157.226) 180.174,156.706 *2.34@186.371,156.706 ; v1(180.95,81.255) 179.165,79.47 177.99,79.47 177.635,79.116 177.635,72.225 178.035,71.825 178.035,68.056 181.7,64.391 184.086,64.391 184.086,64.516
  Bottom Layer w0.2: v1(179.654,157.226) 177.825,155.397 177.825,154.735 177.438,154.348 177.438,152.597 178.479,151.556 178.479,133.153 185.196,126.436 185.196,125.978 185.42,125.754 185.42,116.84 184.359,115.779 184.302,115.779 183.058,114.535 183.058,111.557 180.95,109.449 v1(180.95,81.255)
EBI_A18: *2.21 FPGA_1.H15 GG1.F2
EBI_A19: *2.20 FPGA_1.H16 GG1.F3
EBI_A20: *2.19 FPGA_1.G16 GG1.F4
EBI_A21: *2.18 FPGA_1.G18 GG1.G1 | length 188.2
  Top Layer w0.2: *2.18@175.071,159.106 174.041,159.106 173.537,158.602 173.537,123.336 180.262,116.611 194.437,116.611 199.669,111.379 199.669,98.577 200.558,97.688 213.563,97.688 214.681,98.806 ; 184.087,63.716 178.143,63.716 177.521,64.338 177.521,69.19 173.939,72.771 173.939,95.834 174.549,96.444 212.877,96.444 214.681,98.247 214.681,98.806 ; 214.191,107.918 214.681,107.428 214.681,98.806
EBI_A22: *2.17 FPGA_1.J13 GG1.G2
EBI_AD0: *2.22 GG1.B4
EBI_AD1: *2.24 GG1.A4 | length 94.8
  Top Layer w0.2: *2.24@175.071,154.306 178.536,154.306 v1(179.045,153.797) ; v1(183.54,71.869) 183.54,71.463 186.487,68.516
  Bottom Layer w0.2: v1(179.045,153.797) 179.045,152.578 183.388,148.234 183.388,130.139 186.22,127.307 186.22,112.357 183.54,109.677 v1(183.54,71.869)
EBI_AD2: *2.25 GG1.C3
EBI_AD3: *2.27 GG1.B3
EBI_AD4: *2.28 GG1.A3 | length 99.4
  Top Layer w0.2: v1(176.479,147.295) 177.698,148.514 185.064,148.514 185.903,149.352 185.903,151.906 *2.28@186.371,151.906 ; v1(181.229,71.323) 182.88,71.323 183.896,70.307 183.896,70.122 184.081,70.122 185.687,68.516
  Bottom Layer w0.2: v1(176.479,147.295) 176.479,128.078 176.855,127.702 176.855,122.815 176.962,122.709 176.962,122.184 177.431,121.715 177.649,121.715 181.635,117.729 181.635,112.446 179.756,110.566 179.756,82.461 179.75,82.455 179.75,80.061 179.967,79.843 180.742,79.843 181.635,78.95 181.635,71.73 v1(181.229,71.323)
EBI_AD5: *2.30 GG1.B2
EBI_AD6: *2.31 GG1.A2 | length 93.3
  Top Layer w0.2: v1(182.474,69.088) 184.315,69.088 184.887,68.516 ; v1(184.175,154) 184.481,154.306 *2.31@186.371,154.306
  Bottom Layer w0.2: v1(182.474,69.088) 183.54,69.088 185.318,70.866 185.318,108.534 186.62,109.836 186.62,129.913 186.233,130.3 186.233,139.268 184.066,141.435 184.066,147.125 184.175,147.234 v1(184.175,154)
EBI_AD7: *2.33 GG1.A1 | length 108.7
  Top Layer w0.2: 184.087,68.516 183.687,68.116 182.023,68.116 179.235,70.904 179.235,73.425 178.835,73.825 178.835,76.921 179.181,77.267 v1(191.77,77.267) ; v1(184.988,155.905) *2.33@186.371,155.906
  Bottom Layer w0.2: v1(184.988,155.905) 184.988,148.75 184.911,148.672 184.911,147.17 184.466,146.725 184.466,142.457 187.808,139.116 187.808,109.55 191.77,105.588 v1(191.77,77.267)
EBI_AD8: *2.49 GG1.B1 | length 130.8
  Top Layer w0.2: 184.087,67.716 181.814,67.716 178.835,70.695 178.835,72.625 178.435,73.025 178.435,77.426 179.68,78.67 193.783,78.67 v1(197.587,82.474) ; *2.49@186.371,168.706 189.153,168.706 190.652,167.207 v1(190.652,155.473)
  Bottom Layer w0.2: v1(190.652,155.473) 187.401,152.222 187.401,144.704 189.325,142.78 189.325,142.037 189.801,141.561 190.544,141.561 198.196,133.909 198.196,83.083 v1(197.587,82.474)
EBI_AD9: *2.51 GG1.C2
EBI_AD10: *2.52 GG1.C1 | length 136.5
  Top Layer w0.2: 184.087,66.916 183.795,67.208 180.391,67.208 178.435,69.164 178.435,72.219 178.035,72.619 178.035,77.68 180.01,79.654 v1(190.17,79.654) ; *2.52@186.371,171.106 v1(189.027,171.106)
  Bottom Layer w0.2: v1(189.027,171.106) 185.801,167.88 185.801,148.285 185.318,147.803 185.318,146.304 184.866,145.852 184.866,144.094 191.211,137.749 191.211,112.497 193.7,110.007 193.7,77.495 192.43,76.225 191.618,76.225 190.17,77.673 v1(190.17,79.654)
EBI_AD11: *2.54 GG1.D2
EBI_AD12: *2.1 GG1.D1 | length 116.6
  Top Layer w0.2: *2.1@175.071,172.706 172.923,172.706 172.034,171.817 172.034,135.357 172.618,134.772 172.618,122.936 v1(176.86,118.694) ; v1(181.274,66.402) 181.559,66.116 184.087,66.116
  Bottom Layer w0.2: v1(176.86,118.694) 176.86,94.31 179.337,91.833 179.337,79.743 180.328,78.752 180.853,78.752 181.235,78.37 181.235,73.558 180.429,72.752 180.429,70.841 181.274,69.996 v1(181.274,66.402)
EBI_AD13: *2.3 GG1.E3
EBI_AD14: *2.4 GG1.E2
EBI_AD15: *2.6 GG1.E1 | length 116
  Top Layer w0.2: *2.6@175.071,168.706 176.047,168.706 178.714,166.04 v1(178.892,166.04) ; v1(183.286,65.202) 183.401,65.316 184.087,65.316
  Bottom Layer w0.2: v1(178.892,166.04) 178.105,166.827 176.825,166.827 175.895,165.898 175.895,149.479 177.279,148.095 177.279,123.09 182.042,118.327 182.042,111.531 180.365,109.855 180.365,82.22 180.15,82.004 180.15,80.67 180.556,80.264 181.635,80.264 182.34,79.559 182.34,70.098 181.674,69.431 181.674,68.301 183.286,66.688 v1(183.286,65.202)
EBI_D0: FPGA_1.P18
EBI_D1: FPGA_1.P17
EBI_D2: FPGA_1.N18
EBI_D3: FPGA_1.N17
EBI_D4: FPGA_1.M18
EBI_D5: FPGA_1.M16
EBI_D6: FPGA_1.L18
EBI_D7: FPGA_1.L17
EBI_D8: FPGA_1.K18
EBI_D9: FPGA_1.K17
EBI_D10: FPGA_1.J18
EBI_D11: FPGA_1.J16
EBI_D12: FPGA_1.H18
EBI_D13: FPGA_1.H17
EBI_D14: FPGA_1.L16
EBI_D15: FPGA_1.L15
GPIO0: GG1.H4 R22.2
GPIO1: GG1.H5 R23.2
GPIO2: GG1.J5 R24.2
GPIO3: GG1.J6 R25.2
GPIO4: GG1.K5 R26.2
GPIO5: C56.2 GG1.D3 R12.1 | length 67.3
  Top Layer w0.2: C56.2@241.808,212.17 241.808,211.353 242.468,210.693 251.369,210.693 251.542,210.52 290.432,210.52 295.646,205.306 304.472,205.306 R12.1@305.435,204.343
GPIO6: C57.2 GG1.C11 R13.1 | length 254.3
  Top Layer w0.2: 192.087,66.916 192.087,67.183 192.43,67.183 195.986,70.739 v1(227.686,70.739) ; C57.2@247.65,212.17 v1(249.225,212.17) 250.692,212.17 251.942,210.92 302.407,210.92 303.164,210.163 305.203,210.163 R13.1@311.023,204.343
  Bottom Layer w0.2: v1(227.686,70.739) 249.225,92.278 v1(249.225,212.17)
GPIO7: C58.2 GG1.L11 R14.1 | length 276.3
  Top Layer w0.2: 192.087,60.516 202.128,60.516 206.61,64.999 v1(217.424,64.999) ; v1(237.541,213.512) 252.15,213.512 C58.2@253.492,212.17 253.644,212.17 253.644,212.852 256.438,215.646 v1(314.249,215.646)
  Bottom Layer w0.2: v1(217.424,64.999) 217.424,92.862 231.292,106.731 231.292,175.616 237.134,181.458 237.134,213.106 v1(237.541,213.512) ; v1(314.249,215.646) 314.249,205.257 315.163,204.343 R14.1@316.611,204.343
GPIO8: C59.2 GG1.K11 R15.1 | length 276.4
  Top Layer w0.2: 192.087,61.316 193.751,61.316 201.117,68.682 v1(222.91,68.682) ; v1(238.023,210.388) 240.665,213.03 252.063,213.03 252.342,212.75 252.342,211.32 254.572,211.32 255.422,212.17 C59.2@259.334,212.17 263.183,212.17 264.033,211.32 268.241,211.32 269.9,212.979 296.088,212.979 296.926,212.141 302.457,212.141 304.035,210.563 308.4,210.563 315.62,203.343 317.627,203.343 318.627,204.343 R15.1@322.199,204.343
  Bottom Layer w0.2: v1(222.91,68.682) 222.91,97.028 228.905,103.022 232.258,103.022 233.07,103.835 233.07,146.71 238.023,151.663 v1(238.023,210.388)
GPIO9: C60.2 GG1.J9 R16.1 | length 67.8
  Top Layer w0.2: C60.2@265.176,212.17 266.446,212.17 268.804,214.528 300.879,214.528 304.444,210.963 321.167,210.963 R16.1@327.787,204.343
GPIO10: GG1.J10 P10.1
GPIO11: GG1.H8 P10.2
GPIO12: GG1.B5 P10.3
GPIO13: GG1.C5 P10.4
GPIO14: GG1.C4 P10.5
GPIO15: GG1.H3 P10.6
GPIO16: GG1.J3 P10.7
GPIO17: GG1.F10 P10.8
GPIO18: GG1.E11 P10.9
GPIO19: GG1.A7 P10.10 | length 267.1
  Top Layer w0.2: 188.887,68.516 186.4,71.003 186.4,72.571 185.146,73.825 179.578,73.825 179.235,74.168 179.235,75.413 180.277,76.454 215.671,76.454 221.945,82.728 v1(298.704,82.728)
  Bottom Layer w0.2: v1(298.704,82.728) 302.946,86.97 302.946,200.152 302.692,200.406 301.574,200.406 300.609,201.371 300.609,208.026 P10.10@299.339,209.296
GPIO20: GG1.A10
GPIO21: GG1.A11
GPIO_FPGA0: FPGA_1.A2 R9.2
GPIO_FPGA1: FPGA_1.A3 R10.2
GPIO_FPGA2: C54.2 FPGA_1.A5 R6.1 | length 298.3
  Top Layer w0.2: 203.791,112.718 203.791,115.272 204.14,115.621 v1(212.166,115.621) ; v1(231.292,216.738) 233.375,218.821 326.724,218.821 C54.2@333.375,212.17 333.375,212.75 334.416,213.792 384.899,213.792 385.067,213.624 385.067,210.061 R6.1@379.349,204.343
  Bottom Layer w0.2: v1(212.166,115.621) 215.938,111.849 216.853,111.849 217.17,112.166 217.17,117.602 229.387,129.819 229.387,182.27 231.292,184.175 v1(231.292,216.738)